# Altium PCB SZG-TEMPLATE-STD.PcbDoc
Units mil, origin at the board's own origin, x right, y up, seen from the top; angles counter-clockwise.
Board outline 1771.65 x 2755.91 mil, 4 copper layers (L1-TOP, L2-GND, L3-SIG, L4-BOT), stack 60.25 mil thick; 29 components, 50 nets, 117 pads, 64 vias.
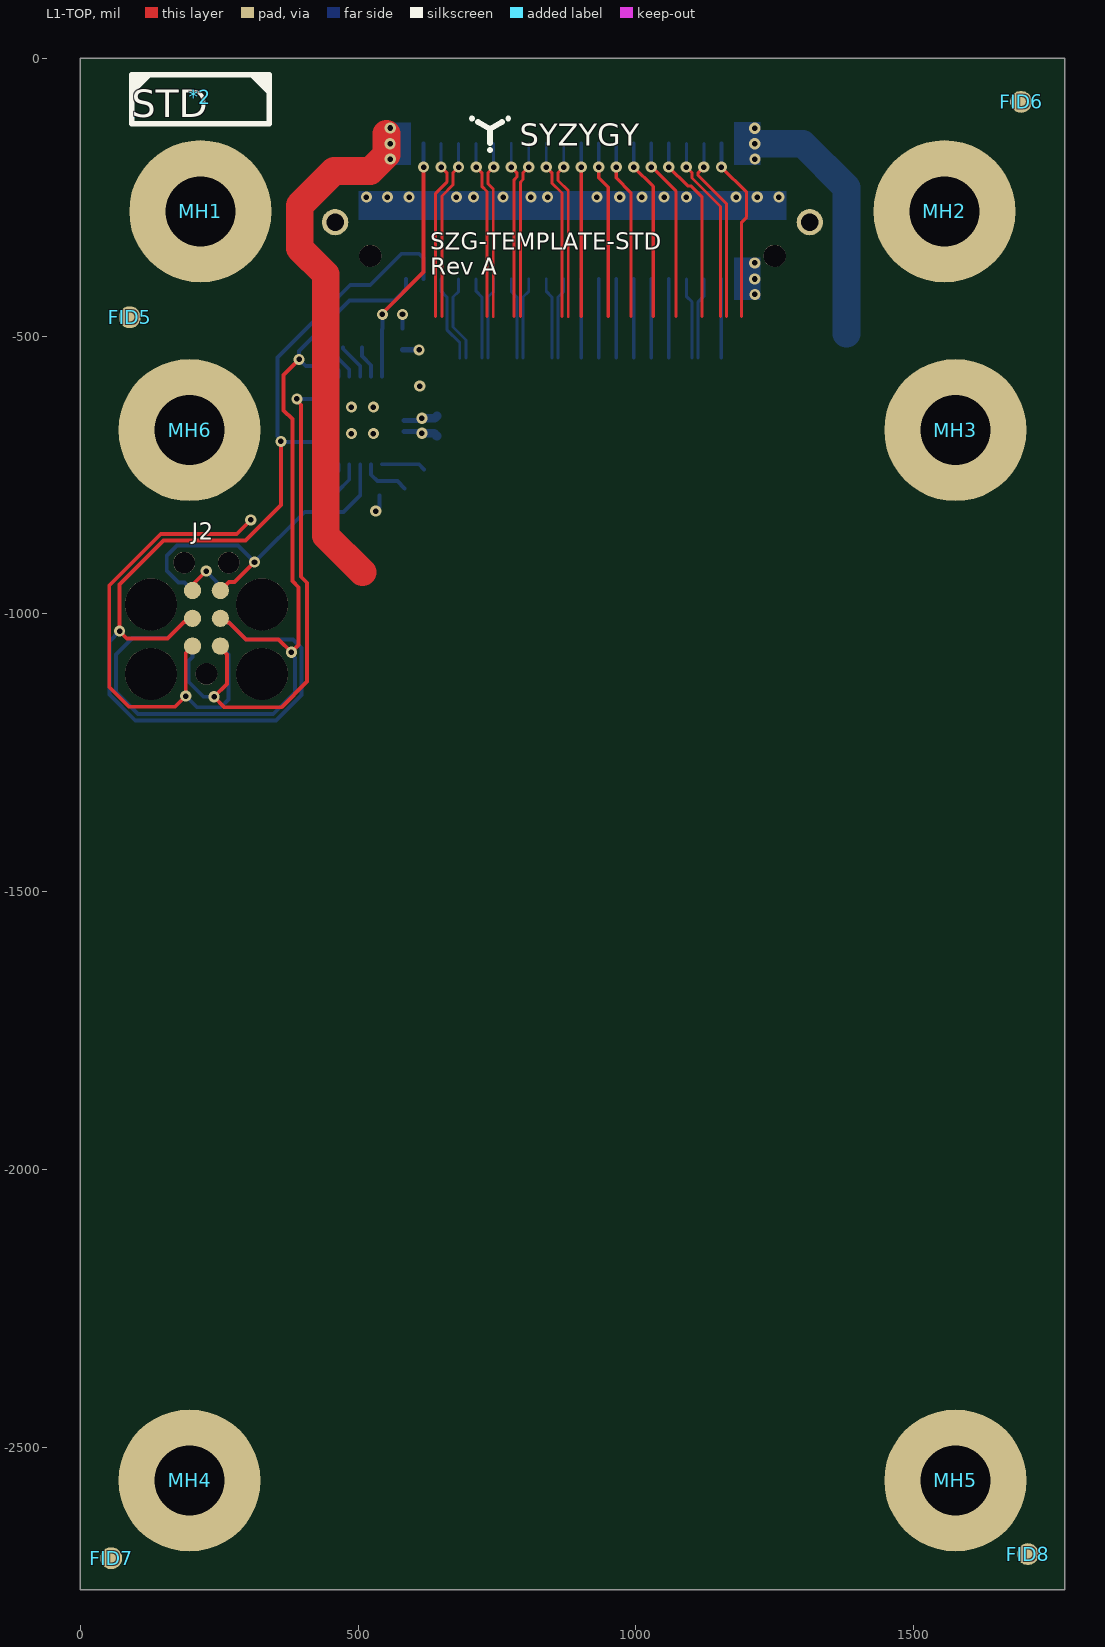
[diagram p0: L1-TOP view]
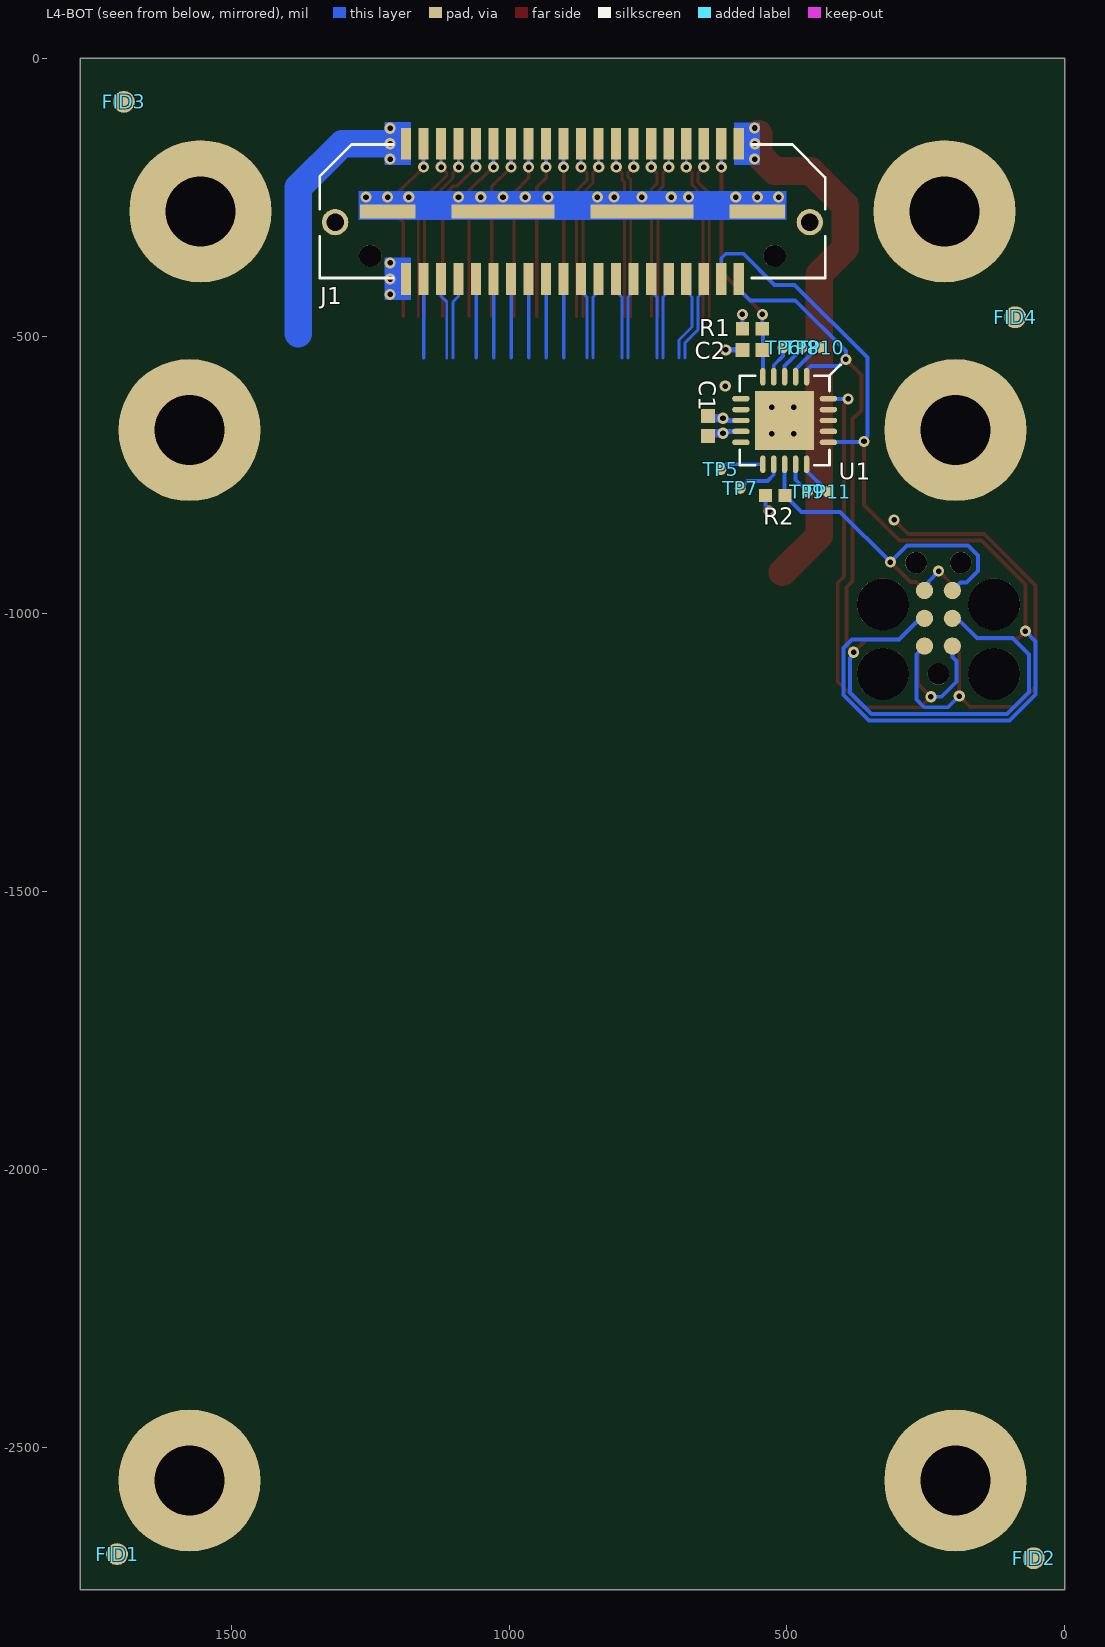
[diagram p1: L4-BOT view, seen from below]
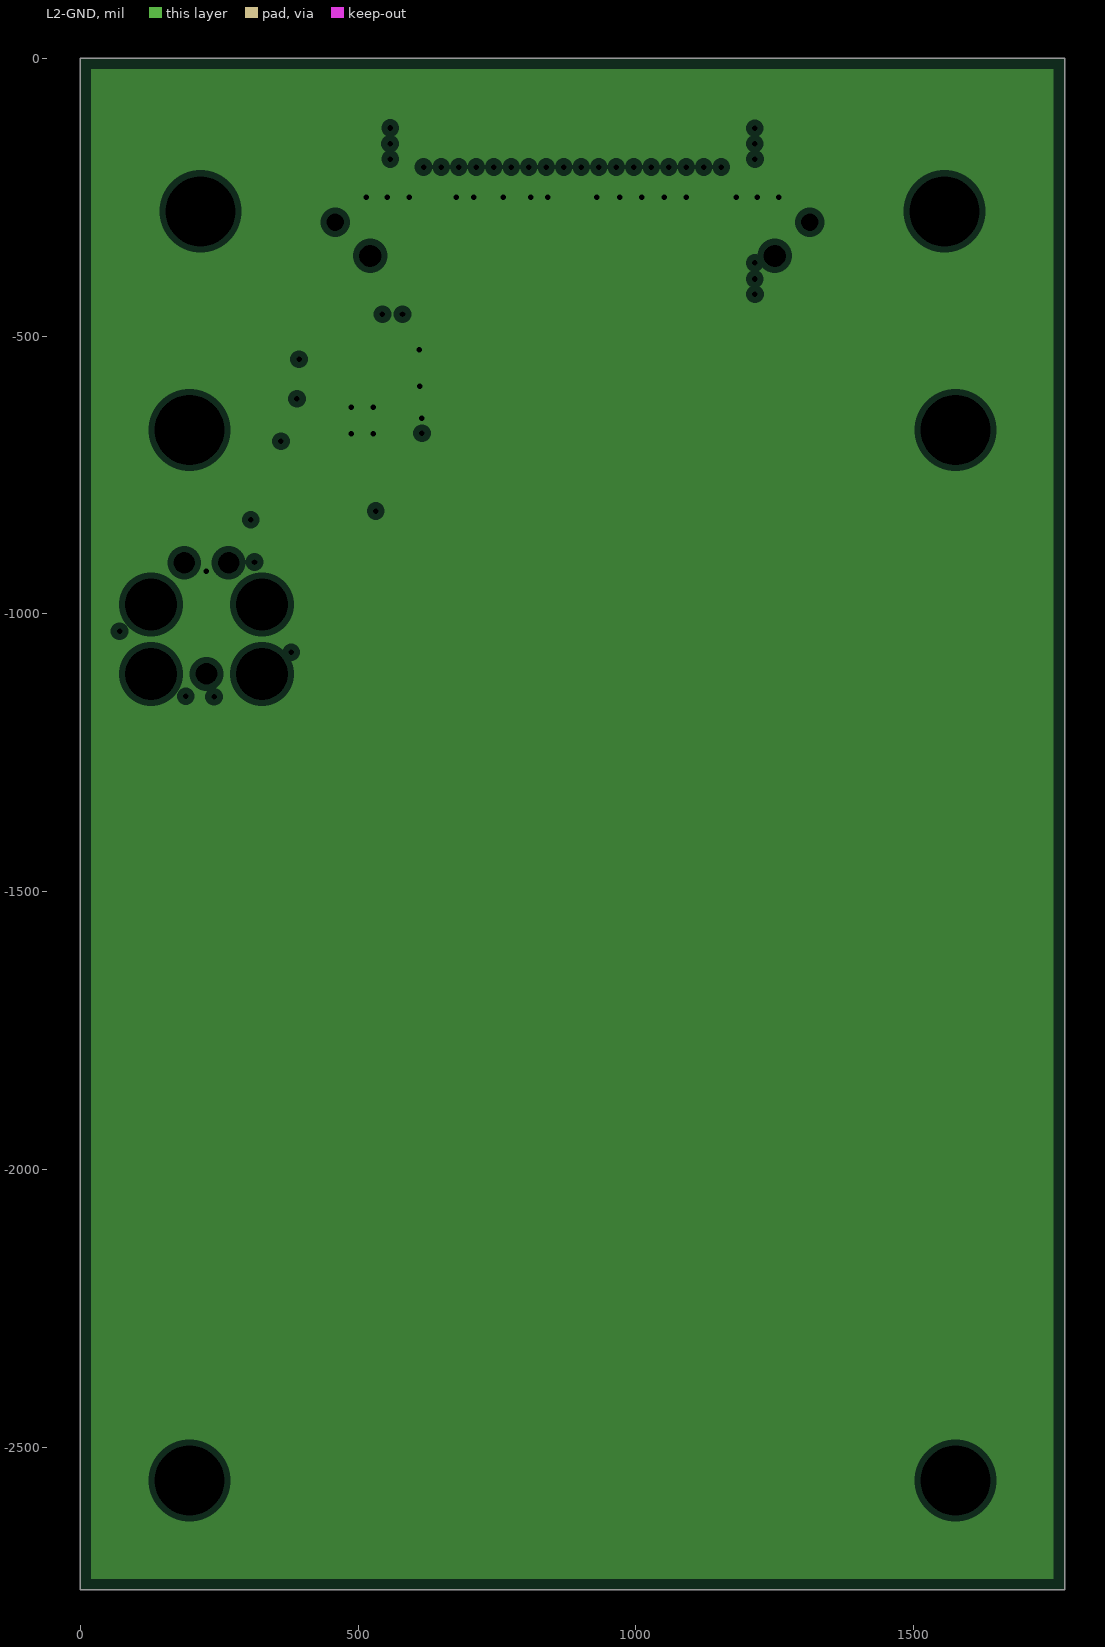
[diagram p2: L2-GND, clearances drawn from the general rule]
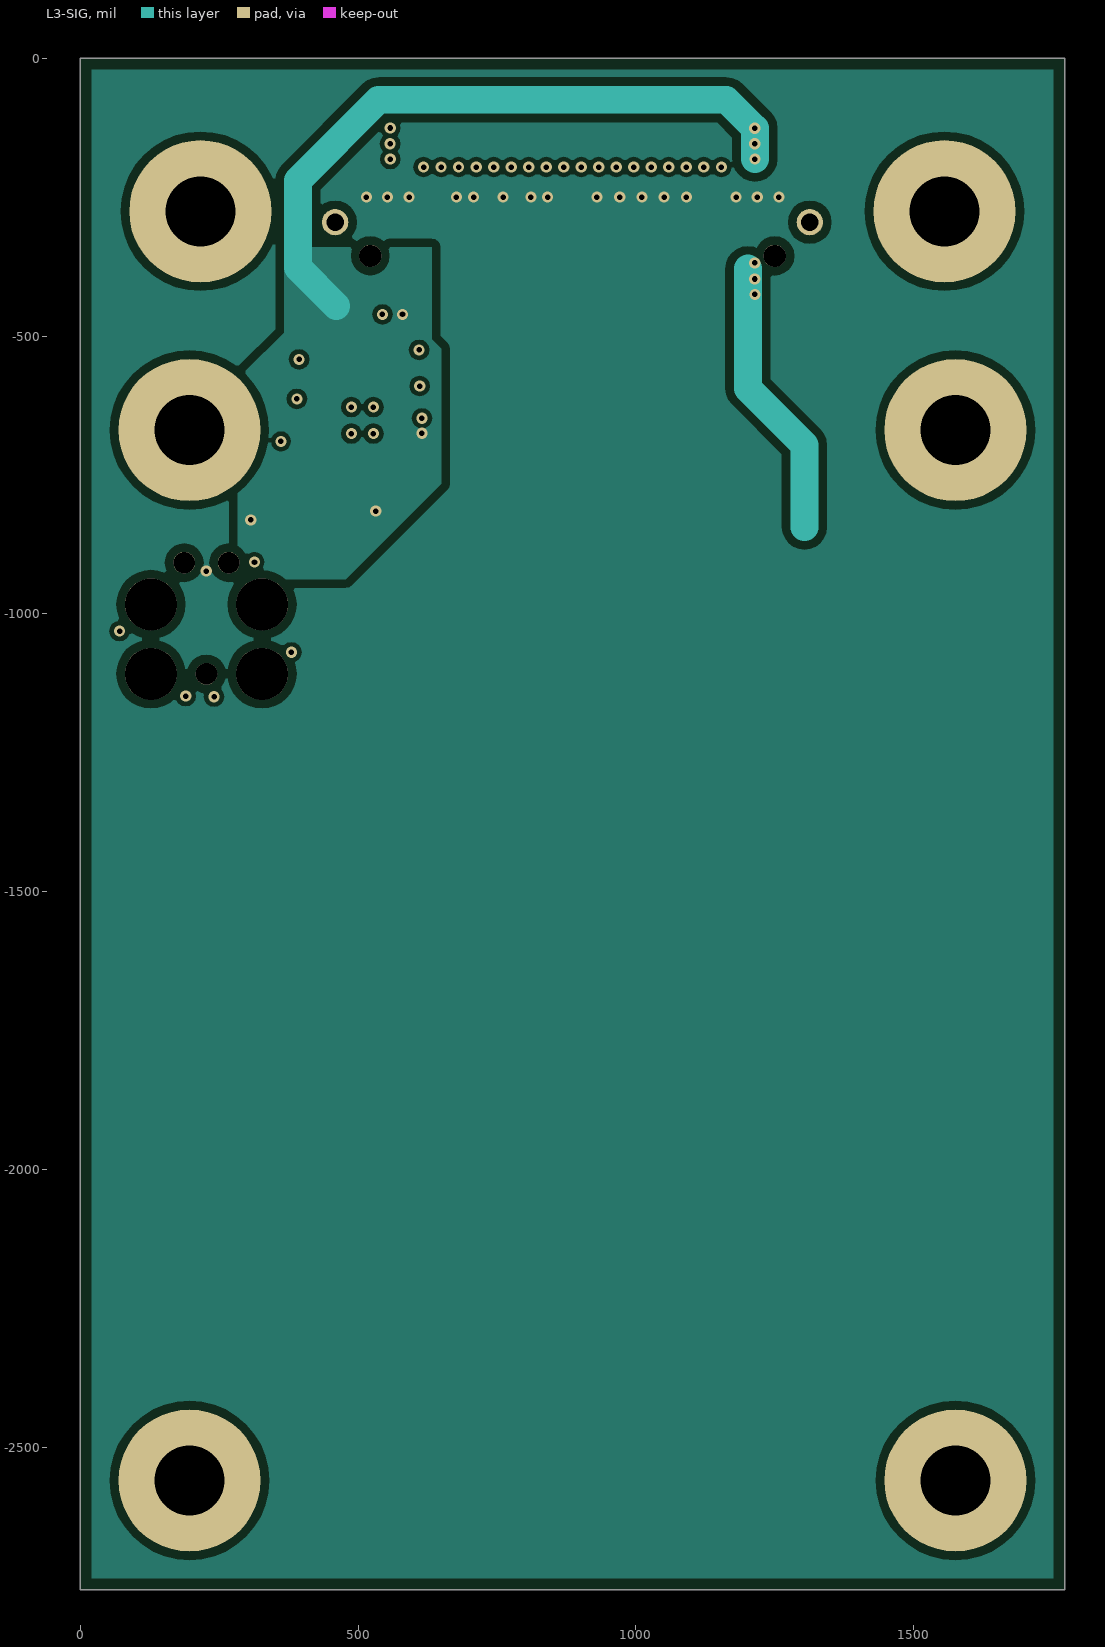
[diagram p3: L3-SIG]

## Layer stack, top to bottom
Top Solder: solder mask 0.4, Solder Resist, Dk 3.9
L1-TOP: signal copper 1.4
Dielectric1: prepreg 5.08, IT180A, Dk 4.2
L2-GND: plane copper 1.4, net GND
Dielectric2: core 44.49, IT180A, Dk 4.2
L3-SIG: signal copper 1.4
Dielectric3: prepreg 5.08, IT180A, Dk 4.2
L4-BOT: signal copper 1.4
Bottom Solder: solder mask 0.4, Solder Resist, Dk 3.9

## Board outline
0,-2755.91 1771.65,-2755.91 1771.65,0 0,0

## Design rules (kind name [scope] priority, off if disabled: settings)
AssemblyTestPointUsage [All] p1 off:
AssemblyTestpoint [All] p1 off: testpointundercomponent=TRUE minsize=40 maxsize=100 preferedsize=60 minholesize=0 maxholesize=40 preferedholesize=32 testpointgrid=1 usegrid=TRUE gridtolerance=0.01 allowsidetop=TRUE allowsidebottom=TRUE
Clearance okClearanceFiducial [Comment = 'FD0'] p1: gap=100 ignorepadtopadclearanceinfootprint=FALSE except(0: Arc-Hole Track-Hole SMDPad-Hole THPad-Hole Via-Hole Fill-Hole Poly-Hole Region-Hole Text-Hole) // Fiducial clearance.
Clearance [All] p2: gap=5 ignorepadtopadclearanceinfootprint=FALSE except(8: Via-Fill Via-Poly Via-Region; 12: Poly-Region Region-Region; 15: Arc-Poly Track-Poly SMDPad-Poly THPad-Poly Fill-Poly Poly-Poly)
ComponentClearance [All] p1 off: gap=10 collisioncheckmode=3 verticalgap=10 showdistances=FALSE
DiffPairsRouting okDiffRouting100ohm [All] p1: maxlimit=6 minlimit=4 mostfreqgap=6 toplayer_mingap=6 toplayer_minwidth=5.25 toplayer_maxwidth=5.25 toplayer_prefwidth=5.25 midlayer6_maxgap=4 midlayer6_prefgap=4 midlayer6_minwidth=3.49 midlayer6_maxwidth=3.49 midlayer6_prefwidth=3.49 bottomlayer_mingap=6 bottomlayer_minwidth=5.25 bottomlayer_maxwidth=5.25 bottomlayer_prefwidth=5.25 maxuncoupledlength=500 // Differential pair spacing for all 100ohm diff routes based on Gorilla Stackup.
FabricationTestPointUsage TestPointUsage [All] p1 off: valid=0 allowmultiple=FALSE
FabricationTestpoint Testpoint [All] p1: side=3 testpointundercomponent=TRUE minsize=20 maxsize=100 preferedsize=60 minholesize=0 maxholesize=40 preferedholesize=32 testpointgrid=1 allowsidetop=TRUE allowsidebottom=TRUE usegrid=TRUE gridtolerance=0.5
HoleSize [All] p1: absolutevalues=TRUE maxlimit=150 minlimit=10 maxpercent=80.000 minpercent=20.000
MatchedLengths MatchedLength_LVDS_pair [InxSignalClass('xSignals_LVDS')] p1: tolerance=10 checknetsindiffpair=TRUE checkdiffpairvsdiffpair=FALSE checkxsignals=FALSE checkothers=FALSE
MaximumViaCount okMaxViaDDR2Odt [InNetClass('okDDR2Data') Or InNetClass('okDDR2Masks') Or InNetClass('okDDR2Strobes')] p1: limit=2 // Set max via count of 2 for signals without external termination.
MaximumViaCount okMaxViaDDR2ExtTerm [InNetClass('okDDR2AddrCtrl') Or InNet('DRAM_C\K\') Or InNet('DRAM_CK')] p2: limit=3 // Set max via count of 3 for signals with external termination.
MinimumSolderMaskSliver [All] p1: minsoldermaskwidth=3
PlaneClearance [All] p1: clearance=11
PlaneConnect PlaneConnectNotVia [Not IsVia] p1: planeconnectstyle=Relief reliefexpansion=20 reliefentries=4 reliefconductorwidth=10 reliefairgap=10
PlaneConnect PlaneConnectVia [IsVia] p2: planeconnectstyle=Direct reliefexpansion=20 reliefentries=4 reliefconductorwidth=10 reliefairgap=10
PolygonConnect PolygonConnect_L1_GND [All] p1: connectstyle=Direct reliefconductorwidth=10 reliefentries=4 polygonreliefangle="90 Angle" airgapwidth=10
PolygonConnect PolygonConnectVia [IsVia] p2: connectstyle=Direct reliefconductorwidth=8 reliefentries=4 polygonreliefangle="90 Angle" airgapwidth=10
PolygonConnect PolygonConnectNotVia [Not IsVia] p3: connectstyle=Relief reliefconductorwidth=10 reliefentries=4 polygonreliefangle="90 Angle" airgapwidth=10
RoutingVias [All] p1: holewidth=8 width=14 viastyle="Through Hole" minholewidth=8 minwidth=14 maxholewidth=40 maxwidth=60
SilkToSilkClearance [All] p1: silktosilkclearance=0.1
SilkToSolderMaskClearance SilkscreenOverComponentPads [IsPad] p1: minsilkscreentomaskgap=1 clearancetoexposedcopper=FALSE
SolderMaskExpansion [All] p1: expansion=2 istentingtop=FALSE
Width okWidthPower [InNetClass('okPower')] p1: maxlimit=100 minlimit=5 preferedwidth=16 midlayer6_prefwidth=14 minimp=50.000000 maximp=50.000000 favimp=50.000000
Width [All] p2: maxlimit=100 minlimit=3 preferedwidth=5 minimp=50.000000 maximp=50.000000 favimp=50.000000 // Non-Controlled routes
18 further rules are at their usual default settings.

## Classes and differential pairs
differential pair DP_AIN1: +"" -""
differential pair DP_AIN2: +"" -""
differential pair DP_C2P_CLK: +C2P_CLKP -C2P_CLKN
differential pair DP_P2C_CLK: +P2C_CLKP -P2C_CLKN
differential pair DP_D0: +S0_D0P -S2_D0N
differential pair DP_D1: +S1_D1P -S3_D1N
differential pair DP_D2: +S4_D2P -S6_D2N
differential pair DP_D3: +S5_D3P -S7_D3N
differential pair DP_D4: +S8_D4P -S10_D4N
differential pair DP_D5: +S9_D5P -S11_D5N
differential pair DP_D6: +S12_D6P -S14_D6N
differential pair DP_D7: +S13_D7P -S15_D7N

## Components (designator, comment, footprint, x,y, rotation, side; value= is the part's Value field where it differs from the comment)
*2 "SZG Port Type Logo" SYZYGYPORTLOGO-STD 216.54,-70.87 r0 top
C1 "C0402C104K8PACTU" CAPC1005X06N 642,-662 r270 bottom value="0.1 u"
C2 "C0402C104K8PACTU" CAPC1005X06N 562,-525 r180 bottom value="0.1 u"
FID1 "FIDUCIAL" FID1MM/2MM-SS 1705.21,-2691.54 r90 bottom
FID2 "FIDUCIAL" FID1MM/2MM-SS 56,-2698.85 r90 bottom
FID3 "FIDUCIAL" FID1MM/2MM-SS 1692.91,-78.74 r90 bottom
FID4 "FIDUCIAL" FID1MM/2MM-SS 89.25,-466.27 r90 bottom
FID5 "FIDUCIAL" FID1MM/2MM-SS 89.25,-466.27 r90 top
FID6 "FIDUCIAL" FID1MM/2MM-SS 1692.91,-78.74 r90 top
FID7 "FIDUCIAL" FID1MM/2MM-SS 56,-2698.85 r90 top
FID8 "FIDUCIAL" FID1MM/2MM-SS 1705.21,-2691.54 r90 top
J1 "QTE-020-01-F-D-A" QTE-020-01-X-D-A-L 885.83,-275.59 r0 bottom
J2 "" TC2030-DUAL 227.36,-1107.87 r90 top
MH1 "MTG" MTG-3.2/6.5-PTH 216.54,-275.59 r0 top locked
MH2 "MTG" MTG-3.2/6.5-PTH 1555.12,-275.59 r0 top locked
MH3 "MTG" MTG-3.2/6.5-PTH 1574.8,-669.29 r0 top locked
MH4 "MTG" MTG-3.2/6.5-PTH 196.85,-2559.06 r0 top locked
MH5 "MTG" MTG-3.2/6.5-PTH 1574.8,-2559.06 r0 top locked
MH6 "MTG" MTG-3.2/6.5-PTH 196.85,-669.29 r0 top locked
R1 "CRCW040210K0FKED" RESC1005X06N 562,-487 r0 bottom value="10.0 k"
R2 "CRCW040210K0FKED" RESC1005X06N 521,-787 r0 bottom value="10.0 k"
TP5 "TESTPOINT-SMD20" TP-SMD20 619,-740 r90 bottom
TP6 "TESTPOINT-SMD20" TP-SMD20 507,-521 r90 bottom
TP7 "TESTPOINT-SMD20" TP-SMD20 584,-774 r90 bottom
TP8 "TESTPOINT-SMD20" TP-SMD20 473,-521 r90 bottom
TP9 "TESTPOINT-SMD20" TP-SMD20 463,-780 r90 bottom
TP10 "TESTPOINT-SMD20" TP-SMD20 439,-521 r90 bottom
TP11 "TESTPOINT-SMD20" TP-SMD20 427,-780 r90 bottom
U1 "ATTINY44A-MU" QFN-EP-20 504,-652 r270 bottom

## Footprints (in the part's own frame and the unit in brackets; to place one, negate y for a bottom-side part, rotate by r counter-clockwise, add the part's x,y. Pads: shape width x height; smd on the part's side, far side on the other; paste and mask are expansions set on the pad)
CAPC1005X06N [mm] "Chip Capacitor, 2-Leads, Body 1.00x0.50mm, IPC Medium Density"
  rect 0.64x0.64 smd: 1(-0.46,0) 2(0.46,0)
  body extent -0.55,-0.3 0.55,0.3, height 0.6
FID1MM/2MM-SS [mm] "Fiducial 1mm copper, 2mm soldermask, single-side"
  round 1 smd paste-0.5 mask+0.5: FID?(0,0)
MTG-3.2/6.5-PTH [mm] "Mounting hole, 3.2mm ID, 6.5mm OD, plated"
  round 6.5 hole 3.2: 1(0,0)
QFN-EP-20 [mm]
  oval 0.8x0.25 smd mask+0.051: 1(-2,1) 2(-2,0.5) 3(-2,0) 4(-2,-0.5) 5(-2,-1) 11(2,-1) 12(2,-0.5) 13(2,0) 14(2,0.5) 15(2,1)
  oval 0.25x0.8 smd mask+0.051: 6(-1,-2) 7(-0.5,-2) 8(0,-2) 9(0.5,-2) 10(1,-2) 16(1,2) 17(0.5,2) 18(0,2) 19(-0.5,2) 20(-1,2)
  rect 2.7x2.7 smd paste-100 mask+0.051: PAD(0,0)
  silkscreen extent -2.55,-2.05 2.05,2.55
QTE-020-01-X-D-A-L [mm] "0.80mm, 40 pin Surface Mount connectors with Ground Strip"
  rect 2.54x0.64 smd paste+0: 0(-8.445,0) 0(8.445,0)
  rect 4.699x0.64 smd paste+0: 0(-3.175,0) 0(3.175,0)
  rect 0.46x1.45 smd paste+0: 1(-7.6,3.09) 2(-7.6,-3.09) 3(-6.8,3.09) 4(-6.8,-3.09) 5(-5.999,3.09) 6(-5.999,-3.09) 7(-5.199,3.09) 8(-5.199,-3.09) 9(-4.399,3.09) 10(-4.399,-3.09) 11(-3.599,3.09) 12(-3.599,-3.09) 13(-2.799,3.09) 14(-2.799,-3.09) 15(-1.999,3.09) 16(-1.999,-3.09) 17(-1.199,3.09) 18(-1.199,-3.09) 19(-0.399,3.09) 20(-0.399,-3.09) 21(0.401,3.09) 22(0.401,-3.09) 23(1.201,3.09) 24(1.201,-3.09) 25(2.002,3.09) 26(2.002,-3.09) 27(2.802,3.09) 28(2.802,-3.09) 29(3.602,3.09) 30(3.602,-3.09) 31(4.402,3.09) 32(4.402,-3.09) 33(5.202,3.09) 34(5.202,-3.09) 35(6.002,3.09) 36(6.002,-3.09) 37(6.802,3.09) 38(6.802,-3.09) 39(7.602,3.09) 40(7.602,-3.09)
  round 1.2 hole 0.8 paste+0: MH(-10.845,0.5) MH(10.845,0.5)
  round 1.02 hole 1.02 unplated paste+0: MH(-9.24,2.04) MH(9.24,2.04)
  silkscreen extent -11.55,-3.05 11.55,3.05
RESC1005X06N [mm] "Chip Resistor, 2-Leads, Body 1.00x0.50mm, IPC Medium Density"
  rect 0.6x0.6 smd: 1(-0.45,0) 2(0.45,0)
  body extent -0.55,-0.3 0.55,0.3, height 0.6
SYZYGYPORTLOGO-STD [mil] "Logo for the SYZYGY STD Port type"
  silkscreen extent -124,-47 124,41
TC2030-DUAL [mil]
  round 31 smd paste-393.7: 1(50,-25) 2(50,25) 3(100,-25) 4(100,25) 5(150,-25) 6(150,25)
  round 31 smd far side paste-393.7: 1(50,25) 2(50,-25) 3(100,25) 4(100,-25) 5(150,25) 6(150,-25)
  round 39 hole 39 unplated: A(0,0) B(200,40) C(200,-40)
  round 93.5 hole 93.5 unplated: D(0,-100) E(125,-100) F(0,100) G(125,100)
TP-SMD20 [mil] "Test point, surface-mount, 20mil"
  round 20 smd paste-78.74: 1(0,0)

## Part data
*2: library part "SYZYGY Port Type Logo", "SYZYGY Port Type Logo", PartNumber=ALIGNI_IGNORE
C1 C2: library part 000070, "Ceramic capacitor", Manufacturer=Kemet, Tolerance (%)=10, ValueFloat=1E-7, Description 2="SM-0402, 10%, 10v", Manufacturer_PN=C0402C104K8PACTU, PartNumber=000070
  C1: updated_on="11/17/2016 12:16:56 PM"
  C2: updated_on="5/15/2017 4:50:04 PM"
FID1 FID2 FID3 FID4 FID5 FID6 FID7 FID8: "PCB fiducial"
J1: library part 000973, Manufacturer=Samtec, created_on="4/3/2013 1:34:16 PM", id=24153, inventory_price=3.86, Manufacturer_PN=QTE-020-01-F-D-A, PartNumber=000973, parttype=Connector, rohs=1, updated_on="2/26/2018 2:13:14 PM"
J2: library part 002062, "Tag-Connect 6-pin Plug-of-Nails spring-pin cable footprint", Manufacturer=Tag-Connect, Manufacturer_PN=TC2030-IDC, AligniPartNumber=002062, parttype=Connector
MH1 MH2 MH3 MH4 MH5 MH6: "Mounting hole"
R1 R2: library part 001521, "Thick-film resistor", Manufacturer=Vishay, Tolerance (%)=1, ValueFloat=10000, Description 2="SM-0402, 1%, 1/16W", Manufacturer_PN=CRCW040210K0FKED, PartNumber=001521, updated_on="3/21/2017 2:29:49 PM", x_lifecycle_status=Production
TP5 TP6 TP7 TP8 TP9 TP10 TP11: "Test point, surface-mount, 20mil"
U1: library part 001552, "8-bit MCU, 4 KB flash, 256 bytes EEPROM", Manufacturer=Microchip, Manufacturer_PN=ATTINY44A-MU, PartNumber=001552, updated_on="5/23/2017 10:51:21 AM", x_lifecycle_status=Production

## Via types
v1: diameter 20, hole 10, L1-TOP to L4-BOT, tented both sides, 64 vias

## Nets (pads, with @x,y where several pads share a name; then routed paths per layer and width w, separated by ;. In a path a pad name is that pad's centre, name@x,y a point inside that pad or via, vN(x,y) a via of type N, cw(c..) or ccw(c..) an arc to the next point about the centre after c; other vN are vias at no path point)
+3.3V: C1.2 J1.40 J2.2 R1.2 R2.2 U1.9 | length 2728.6
  L1-TOP w7: J2.2@202.36,-1057.87 190,-1070.24 v1(190,-1148) 171,-1167 88,-1167 52.5,-1131.5 52.5,-948.53 145.03,-856 281.8,-856 v1(307.09,-830.71)
  L3-SIG w50: 461,-446 392,-377 392,-220 537,-75 1162.62,-75 v1(1213.75,-126.13) ; v1(1214,-181.69) v1@1214,-126.13
  L4-BOT w7: v1(190,-1148) 209.98,-1167.98 253.02,-1167.98 267,-1154 267,-1072.51 J2.2@252.36,-1057.87 ; v1(532,-815) 538.72,-808.28 R2.2 ; R1.2 579.72,-461.28 v1(580,-461)
  L4-BOT w9: U1.9 611.69,-671.69 v1(615,-675)
  L4-BOT w16: v1(615,-675) 636.89,-675 C1.2
  L4-BOT w50: v1(1213.75,-154.13) 1300.13,-154.13 1379,-233 1379,-496
+5V: J1.2 | length 938.6
  L1-TOP w50: 507.87,-925.2 442,-859.32 442,-389 395,-342 395,-265 457,-203 522,-203 551,-174 551,-136
  other v1: 558,-181.74 557.75,-154.18 558,-125.74
C2P_CLKN: J1.36 | length 336.1
  L1-TOP w5.25: v1(1122.13,-196) 1112,-206.12 1112,-211.09 1163.25,-262.34 1163.25,-464.57
  L4-BOT w5.25: v1(1122.13,-196) J1.36
C2P_CLKP: J1.34 | length 336.1
  L1-TOP w5.25: v1(1090.63,-196) 1100.75,-206.12 1100.75,-215.75 1152,-267 1152,-464.57
  L4-BOT w5.25: v1(1090.63,-196) J1.34
GND: C1.1 C2.1 J1.0 J2.6 U1.8 U1.PAD | length 183
  L1-TOP w7: J2.6@202.36,-957.87 206.95,-953.28 206.95,-943.05 v1(227,-923)
  L4-BOT w7: v1(227,-923) 227,-923.85 245.31,-942.16 245.31,-944.33 252.36,-951.38 J2.6@252.36,-957.87
  L4-BOT w9: U1.8 611,-652 v1(615,-648)
  L4-BOT w10: C2.1 v1(610,-525)
  L4-BOT w16: v1(615,-648) 637.89,-648 C1.1
  other v1: 488,-675.62 527.62,-675.62 488,-628 527.62,-628 611,-590 515,-250 553,-250 592,-250 677,-250 708,-250 761,-250 811,-250 841,-250 929.83,-250 970.83,-250 1010.83,-250 1050.83,-250 1090.83,-250 1180.31,-250 1218.31,-250 1257.31,-250
MCU_MISO: J2.1 U1.20 | length 976.1
  L1-TOP w7: J2.1@252.36,-1057.87 252.36,-1061.47 264,-1073.11 264,-1126 v1(241,-1149) 260,-1168 362,-1168 408.56,-1121.44 408.56,-943.99 397.64,-933.07 397.64,-623.6 390,-615.96 v1(390,-613)
  L4-BOT w7: J2.1@202.36,-1057.87 202.36,-1077.64 195,-1085 195,-1122 222,-1149 v1(241,-1149) ; v1(390,-613) 424.89,-613 U1.20
MCU_RESET_B: J2.5 R2.1 U1.13 | length 643.3
  L1-TOP w7: J2.5@252.36,-957.87 267.83,-942.41 277.87,-942.41 313.52,-906.76 v1(313.75,-906.76)
  L4-BOT w7: J2.5@202.36,-957.87 202.06,-957.87 187.66,-943.48 176.91,-943.48 156,-922.57 156,-895 174,-877 284,-877 v1(313.75,-906.76) 404.23,-816.28 474,-816.28 R2.1 ; R2.1@504,-786.28 U1.13
MCU_SCL_USCK: J1.1 J2.3 U1.1 | length 1731.6
  L1-TOP w7: J2.3@252.36,-1007.87 258.86,-1007.87 266.25,-1015.27 267.74,-1015.27 298.47,-1046 357,-1046 v1(380,-1069) 393.05,-1055.95 393.05,-952.1 381.89,-940.94 381.89,-649.61 366.14,-633.86 366.14,-569.86 v1(394,-542)
  L4-BOT w7: J2.3@202.36,-1007.87 195.87,-1007.87 188.83,-1014.92 186.64,-1014.92 158.24,-1043.31 94.49,-1043.31 64.6,-1073.19 64.6,-1140.34 104.24,-1179.98 347.6,-1179.98 386.5,-1141.08 386.5,-1079.02 380,-1072.52 v1(380,-1069) ; U1.1 464.63,-561.63 457,-554 406,-554 v1(394,-542) 394,-527 485,-436 566,-436 586.63,-415.37 J1.1
MCU_SDA_MOSI: J1.3 J2.4 U1.16 | length 2057.9
  L1-TOP w7: J2.4@202.36,-1007.87 195.87,-1007.87 188.87,-1014.88 186.59,-1014.88 157.47,-1044 84,-1044 v1(71,-1031) 71,-947 150,-868 297.35,-868 361.29,-804.06 v1(361.29,-689.48)
  L4-BOT w7: v1(71,-1031) 52.6,-1049.4 52.6,-1145.31 99.27,-1191.98 352.57,-1191.98 398.5,-1146.05 398.5,-1061.34 383.16,-1046 298.3,-1046 267.65,-1015.35 266.33,-1015.35 258.86,-1007.87 J2.4@252.36,-1007.87 ; U1.16 424.89,-691 362.82,-691 362.82,-687.48 355,-679.67 355,-539 486,-408 522,-408 578,-352 610,-352 618.13,-360.13 J1.3
NetTP5_1: TP5.1 U1.11 | length 79.5
  L4-BOT w7: U1.11 609.74,-730.74 TP5.1
NetTP6_1: TP6.1 U1.4 | length 59.2
  L4-BOT w7: TP6.1 507,-536 523.69,-552.69 U1.4
NetTP7_1: TP7.1 U1.12 | length 89.3
  L4-BOT w7: U1.12 523.69,-749.69 535,-761 571,-761 TP7.1
NetTP8_1: TP8.1 U1.3 | length 65.1
  L4-BOT w7: TP8.1 473,-523 504,-554 U1.3
NetTP9_1: TP9.1 U1.14 | length 58.1
  L4-BOT w7: TP9.1 484.31,-758.69 U1.14
NetTP10_1: TP10.1 U1.2 | length 74.5
  L4-BOT w7: TP10.1 445,-521 484.31,-560.31 U1.2
NetTP11_1: TP11.1 U1.15 | length 64.8
  L4-BOT w7: TP11.1 464.63,-742.37 U1.15
P2C_CLKN: J1.35 | length 146.3
  L4-BOT w5.25: 1112,-539.37 1112,-438.54 1122.13,-428.41 J1.35
P2C_CLKP: J1.33 | length 146.3
  L4-BOT w5.25: J1.33 1090.63,-428.41 1100.75,-438.54 1100.75,-539.37
R_GA: C2.2 J1.4 R1.1 U1.5 | length 450.5
  L1-TOP w7: v1@544,-459 618,-385 v1(618,-196)
  L4-BOT w7: U1.5 543.37,-487.91 R1.1 544.28,-459.28 v1@544,-459 ; v1(618,-196) 618.13,-195.87 J1.4
  other v1: 544,-461
RSVD_37: J1.37 | length 142.1
  L4-BOT w6: 1153.63,-539.37 J1.37
RSVD_38: J1.38 | length 333.2
  L1-TOP w6: v1(1153.63,-196) 1199,-241.37 1199,-286 1190,-295 1190,-464.57
  L4-BOT w7: v1(1153.63,-196) J1.38
S0_D0P: J1.5 | length 155.9
  L4-BOT w5.25: J1.5 649.63,-419.63 659.75,-429.75 659.75,-488.66 683,-511.91 683,-539.37
S1_D1P: J1.6 | length 323.1
  L1-TOP w5.25: 639.75,-464.57 639.75,-243.25 659.75,-223.25 659.75,-206.12 v1(649.63,-196)
  L4-BOT w5.25: v1(649.63,-196) J1.6
S2_D0N: J1.7 | length 155.9
  L4-BOT w5.25: J1.7 681.13,-419.87 671,-430 671,-484 694.25,-507.25 694.25,-539.37
S3_D1N: J1.8 | length 323.1
  L1-TOP w5.25: 651,-464.57 651,-247.91 671,-227.91 671,-206.12 v1(681.13,-196)
  L4-BOT w5.25: v1(681.13,-196) J1.8
S4_D2P: J1.9 | length 146.3
  L4-BOT w5.25: J1.9 712.63,-419.63 722.75,-429.75 722.75,-539.37
S5_D3P: J1.10 | length 318.7
  L1-TOP w5.25: v1(712.63,-196) 722.75,-206.12 722.75,-230.66 732.13,-240.03 732.13,-464.57
  L4-BOT w5.25: v1(712.63,-196) J1.10
S6_D2N: J1.11 | length 146.3
  L4-BOT w5.25: 734,-539.37 734,-430 744.13,-419.87 J1.11
S7_D3N: J1.12 | length 318.7
  L1-TOP w5.25: 743.38,-464.57 743.38,-235.37 734,-226 734,-206.12 v1(744.13,-196)
  L4-BOT w5.25: v1(744.13,-196) J1.12
S8_D4P: J1.13 | length 146.3
  L4-BOT w5.25: J1.13 775.63,-419.63 785.75,-429.75 785.75,-539.37
S9_D5P: J1.14 | length 316.8
  L1-TOP w5.25: v1(775.63,-196) 785.75,-206.12 785.75,-214 781,-218.75 781,-464.57
  L4-BOT w5.25: v1(775.63,-196) J1.14
S10_D4N: J1.15 | length 146.3
  L4-BOT w5.25: 797,-539.37 797,-430 807.13,-419.87 J1.15
S11_D5N: J1.16 | length 316.8
  L1-TOP w5.25: 792.25,-464.57 792.25,-223.41 797,-218.66 797,-206.12 v1(807.13,-196)
  L4-BOT w5.25: v1(807.13,-196) J1.16
S12_D6P: J1.17 | length 146.3
  L4-BOT w5.25: J1.17 838.63,-419.63 848.75,-429.75 848.75,-539.37
S13_D7P: J1.18 | length 322.4
  L1-TOP w5.25: v1(838.63,-196) 848.75,-206.12 848.75,-224.66 867,-242.91 867,-464.57
  L4-BOT w5.25: v1(838.63,-196) J1.18
S14_D6N: J1.19 | length 146.3
  L4-BOT w5.25: 860,-539.37 860,-430 870.13,-419.87 J1.19
S15_D7N: J1.20 | length 322.4
  L1-TOP w5.25: v1(870.13,-196) 860,-206.12 860,-220 878.25,-238.25 878.25,-464.57
  L4-BOT w5.25: v1(870.13,-196) J1.20
S16: J1.21 | length 142.1
  L4-BOT w6: 901.63,-539.37 J1.21
S17: J1.22 | length 310.6
  L1-TOP w6: 901.63,-464.57 v1(901.63,-196)
  L4-BOT w7: v1(901.63,-196) J1.22
S18: J1.23 | length 142.1
  L4-BOT w6: 933.13,-539.37 J1.23
S19: J1.24 | length 317.6
  L1-TOP w6: v1(933.13,-196) 933.13,-215.13 950,-232 950,-464.57
  L4-BOT w7: v1(933.13,-196) J1.24
S20: J1.25 | length 142.1
  L4-BOT w6: 964.63,-539.37 J1.25
S21: J1.26 | length 321.6
  L1-TOP w6: v1(964.63,-196) 964.63,-215.63 991,-242 991,-464.57
  L4-BOT w7: v1(964.63,-196) J1.26
S22: J1.27 | length 142.1
  L4-BOT w6: 996.13,-539.37 J1.27
S23: J1.28 | length 325.1
  L1-TOP w6: v1(996.13,-196) 1031,-230.87 1031,-464.57
  L4-BOT w7: v1(996.13,-196) J1.28
S24: J1.29 | length 142.1
  L4-BOT w6: 1027.63,-539.37 J1.29
S25: J1.30 | length 333.2
  L1-TOP w6: v1(1027.63,-196) 1029,-196 1072,-239 1072,-464.57
  L1-TOP w7: v1(1027.63,-196) v1@1030,-198.37
  L4-BOT w7: v1(1027.63,-196) J1.30
S26: J1.31 | length 142.1
  L4-BOT w6: 1059.13,-539.37 J1.31
S27: J1.32 | length 338.9
  L1-TOP w6: v1(1059.13,-196) 1093.13,-230 1099,-230 1119,-250 1119,-464.57
  L4-BOT w7: v1(1059.13,-196) J1.32
VIO: J1.39 | length 507.5
  L3-SIG w50: 1201.44,-378.56 1201.44,-425 1201.44,-594.44 1303.15,-696.15 1303.15,-843.93
  other v1: 1214,-425 1213.75,-397.44 1213.75,-368.44
pads on no net: FID1.FID? FID2.FID? FID3.FID? FID4.FID? FID5.FID? FID6.FID? FID7.FID? FID8.FID? J1.MH J2.A J2.B J2.C J2.D J2.E J2.F J2.G MH1.1 MH2.1 MH3.1 MH4.1 MH5.1 MH6.1 U1.6 U1.7 U1.10 U1.17 U1.18 U1.19

## Polygon pours and split planes (outlines as drawn)
GND on L3-SIG "L3_GND" (solid, pour order 22): 21,-2735 21,-21 1751,-21 1751,-2735
+3.3V on L3-SIG "L3_+3.3V" (solid, pour order 20): 367,-340 367,-494 283.46,-577.54 283.46,-938 478,-938 650,-766 650,-523 633,-506 633,-340
GND on L2-GND (split plane): 1751.56,-2735.81 20.1,-2735.81 20.1,-20.1 1751.56,-20.1

## Other copper
L4-BOT:
  region net +3.3V: 1223.75,-115.13 1176.75,-115.13 1176.75,-192.13 1223.75,-192.13
  rectangle net GND: 501,-291 1271,-239
  region net VIO: 1223.75,-358.44 1176.75,-358.44 1176.75,-435.44 1223.75,-435.44
  rectangle net +5V: 548,-192.74 595,-115.74

## Silkscreen, mask and mechanical layers (free items; w line width, h text height)
Top Overlay:
  lines w10.5: 704.74,-108.48 704.84,-108.48 ; 715.84,-114.98 737.34,-127.48 ; 737.34,-165.48 737.44,-165.48 ; 737.34,-152.48 737.34,-127.48 ; 758.84,-114.98 737.34,-127.48 ; 770.24,-108.48 770.34,-108.48
  text "SYZYGY" at 791.34,-157.48 h40
  text "SZG-TEMPLATE-STD / Rev A" at 629.92,-389.76 h30
Outline:
  the board outline again, w10
Mechanical:
  lines w7.87: 0,-472.44 1771.65,-472.44
  text "Carrier board edge" at 452.76,-551.18 h50
Fab Notes:
  text ":::" at 846,28 h50
  text ":::" at -48,-1325 h50 r90
  text ":::" at 1840,-1337 h50 r90
  text ":::" at 840,-2826 h50
  text "ALL UNITS IN MILLIMETERS UNLESS OTHERWISE SPECIFIED" at -461,-3405.74 h50
Doc-Assy-Top:
  lines w2.23: -1668.15,-2438.56 -1578.92,-2438.56 ; -1668.15,-1490.4 -1578.92,-1490.4 ; -1668.15,-542.24 -1578.92,-542.24 ; -530.36,-3297.48 -530.36,-3208.25 ; -530.36,227.44 -530.36,316.68 ; 696.67,-3297.48 696.67,-3208.25 ; 696.67,227.44 696.67,316.68 ; 1053.62,-3297.48 3061.49,-3297.48 ; 1635.31,-3208.12 1635.31,-2890.09 2971.88,-2890.09 ; 1635.31,-3100.8 2971.88,-3100.8 ; 1837.01,-3208.12 1837.01,-3100.8 ; 1923.7,-3297.48 1923.7,-3208.25 ; 1923.7,227.44 1923.7,316.68 ; 2149.94,-3208.12 2149.94,-3100.8 ; 2212.51,-3100.67 2212.51,-2890.09 ; 2612.54,-3208.12 2612.54,-3100.8 ; 2972.25,-2438.56 3061.49,-2438.56 ; 2972.25,-1490.4 3061.49,-1490.4 ; 2972.25,-542.24 3061.49,-542.24 ; 3061.49,-3297.48 -1668.15,-3297.48 -1668.15,316.68 3061.49,316.68 3061.49,-3297.48 ; -1578.92,-3208.25 2972.25,-3208.25 2972.25,227.44 -1578.92,227.44 -1578.92,-3208.25
  text "1" at -1154.44,257.85 h31.23
  text "2" at 72.89,257.85 h31.23
  text "3" at 1297.69,257.85 h31.23
  text "4" at 2525.17,257.85 h31.23
  text "A" at -1636.1,-108.54 h31.23
  text "A" at 3007.12,-108.54 h31.23
  text "B" at -1636.1,-1056.7 h31.23
  text "B" at 3007.12,-1056.7 h31.23
  text "C" at -1636.1,-2004.86 h31.23
  text "C" at 3007.12,-2004.86 h31.23
  text "TITLE:" at 1669.95,-2925.21 h20.07
  text "Opal Kelly" at 2247.63,-2939.26 h31.22
  text "D" at -1636.1,-2950.79 h31.23
  text "D" at 3007.12,-2950.79 h31.23
  text "13500 SW 72nd Ave Suite 100" at 2247.63,-2991.93 h31.22
  text "Portland, OR 97223" at 2247.63,-3035.83 h31.22
  text "SZG-TEMPLATE-STD" at 1684.38,-3036.58 h31.22
  text "www.opalkelly.com" at 2247.63,-3079.73 h31.22
  text "(Top)" at 1684.38,-3087.43 h31.22
  text "REV:" at 1660.14,-3130.54 h20.07
  text "SIZE:" at 1864.22,-3130.54 h20.07
  text "ENGINEER:" at 2177.16,-3130.54 h20.07
  text "DATE:" at 2639.75,-3130.54 h20.07
  text "A" at 1687.35,-3184.96 h31.22
  text "ANSI A" at 1891.43,-3184.96 h31.22
  text "RCA" at 2204.37,-3184.96 h31.22
  text ".PRINT_DATE" at 2666.96,-3184.96 h31.22
  text "1" at -1154.44,-3269.89 h31.23
  text "2" at 72.89,-3269.89 h31.23
  text "3" at 1297.69,-3269.89 h31.23
  text "4" at 2525.17,-3269.89 h31.23
Doc-Assy-Bot:
  lines w2.23: -1667.63,-2439.08 -1578.38,-2439.08 ; -1667.63,-1490.83 -1578.38,-1490.83 ; -1667.63,-542.57 -1578.38,-542.57 ; -1578.01,-3101.39 -241.3,-3101.39 ; -1578.01,-2890.66 -241.3,-2890.66 -241.3,-3208.72 ; -1218.63,-3208.72 -1218.63,-3101.39 ; -818.56,-3101.25 -818.56,-2890.66 ; -755.99,-3208.72 -755.99,-3101.39 ; -529.72,-3298.09 -529.72,-3208.84 ; -529.72,227.19 -529.72,316.43 ; -443.02,-3208.72 -443.02,-3101.39 ; 340.44,-3298.09 -1667.63,-3298.09 ; 697.43,-3298.09 697.43,-3208.84 ; 697.43,227.19 697.43,316.43 ; 1924.59,-3298.09 1924.59,-3208.84 ; 1924.59,227.19 1924.59,316.43 ; 2973.24,-2439.08 3062.49,-2439.08 ; 2973.24,-1490.83 3062.49,-1490.83 ; 2973.24,-542.57 3062.49,-542.57 ; -1667.63,-3298.09 3062.49,-3298.09 3062.49,316.43 -1667.63,316.43 -1667.63,-3298.09 ; -1578.38,-3208.84 2973.24,-3208.84 2973.24,227.19 -1578.38,227.19 -1578.38,-3208.84
  text "4" at -1131.25,257.6 h31.24
  text "3" at 96.35,257.6 h31.24
  text "2" at 1321.27,257.6 h31.24
  text "1" at 2548.72,257.6 h31.24
  text "A" at -1613.25,-108.83 h31.24
  text "A" at 3030.43,-108.83 h31.24
  text "B" at -1613.25,-1057.09 h31.24
  text "B" at 3030.43,-1057.09 h31.24
  text "C" at -1613.25,-2005.34 h31.24
  text "C" at 3030.43,-2005.34 h31.24
  text "TITLE:" at -275.94,-2925.78 h20.07
  text "Opal Kelly" at -853.68,-2939.83 h31.22
  text "D" at -1613.25,-2951.36 h31.24
  text "D" at 3030.43,-2951.36 h31.24
  text "13500 SW 72nd Ave Suite 100" at -853.68,-2992.51 h31.22
  text "Portland, OR 97223" at -853.68,-3036.41 h31.22
  text "SZG-TEMPLATE-STD" at -290.38,-3037.16 h31.22
  text "www.opalkelly.com" at -853.68,-3080.31 h31.22
  text "(Bottom)" at -290.38,-3088.01 h31.22
  text "DATE:" at -1245.85,-3131.13 h20.07
  text "ENGINEER:" at -783.2,-3131.13 h20.07
  text "SIZE:" at -470.24,-3131.13 h20.07
  text "REV:" at -266.13,-3131.13 h20.07
  text ".PRINT_DATE" at -1273.06,-3185.55 h31.22
  text "RCA" at -810.42,-3185.55 h31.22
  text "ANSI A" at -497.45,-3185.55 h31.22
  text "A" at -293.35,-3185.55 h31.22
  text "4" at -1131.25,-3270.49 h31.24
  text "3" at 96.35,-3270.49 h31.24
  text "2" at 1321.27,-3270.49 h31.24
  text "1" at 2548.72,-3270.49 h31.24

## Dimensions
0,0 to 0,-2755.91 on Dimensions
0,0 to 1771.65,0 on Dimensions
0,-2755.91 to 196.85,-2559.06 on MTG Locations
0,-2755.91 to 196.85,-2559.06 on MTG Locations
0,0 to 196.85,-669.29 on MTG Locations
0,-2755.91 to 1574.8,-2559.06 on MTG Locations
0,0 to 216.54,-275.59 on MTG Locations
216.54,-275.59 to 1555.12,-275.59 on MTG Locations
0,0 to 216.54,-275.59 on MTG Locations

## Text inside footprints (layer, text, board x,y; h text height)
*2: Top Overlay "STD" at 93.01,-106.3 h50